# EAGLE board temaTSCpcb (EAGLE 9.7.0)
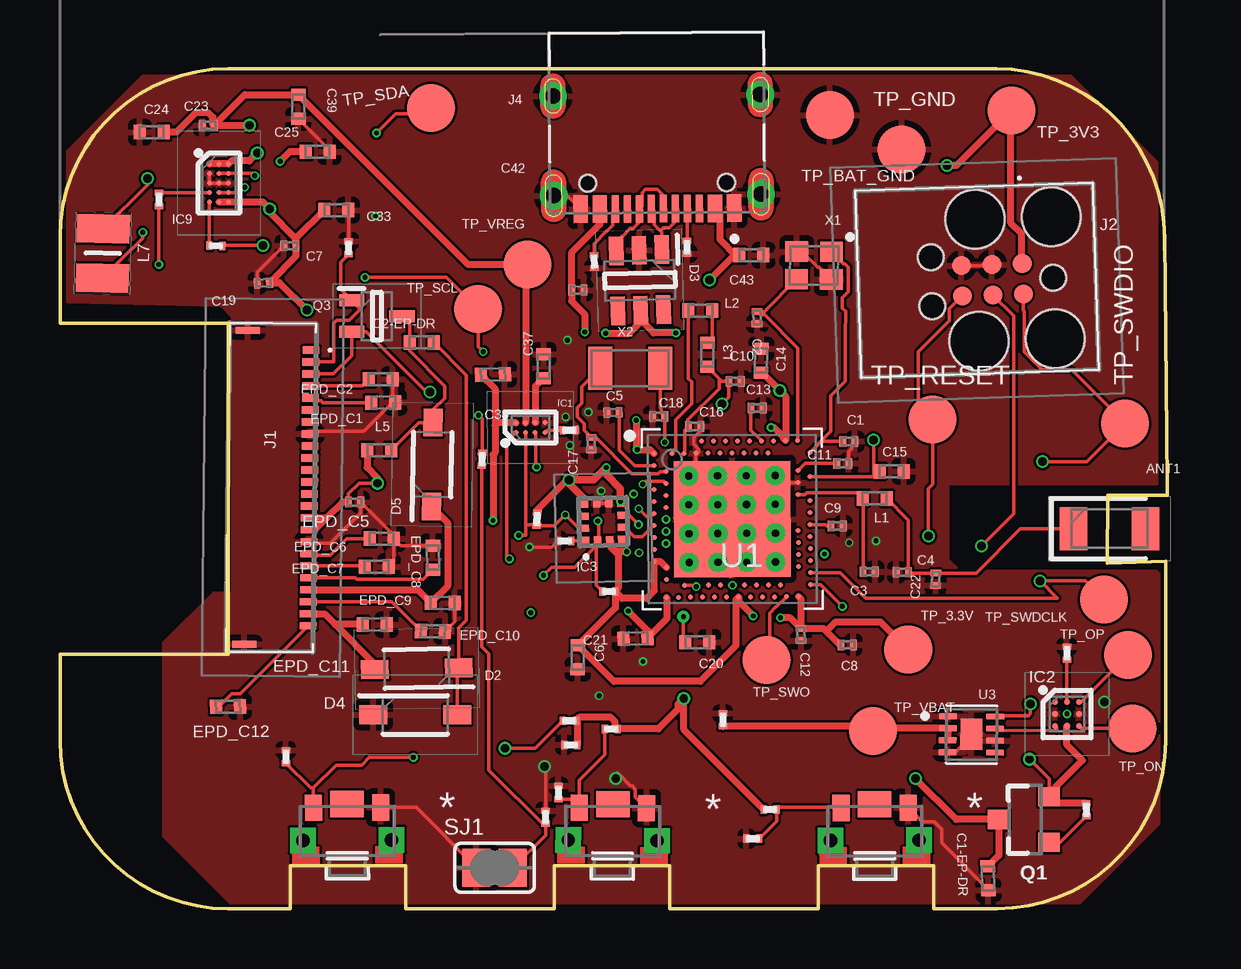
[diagram p0: board, top side]
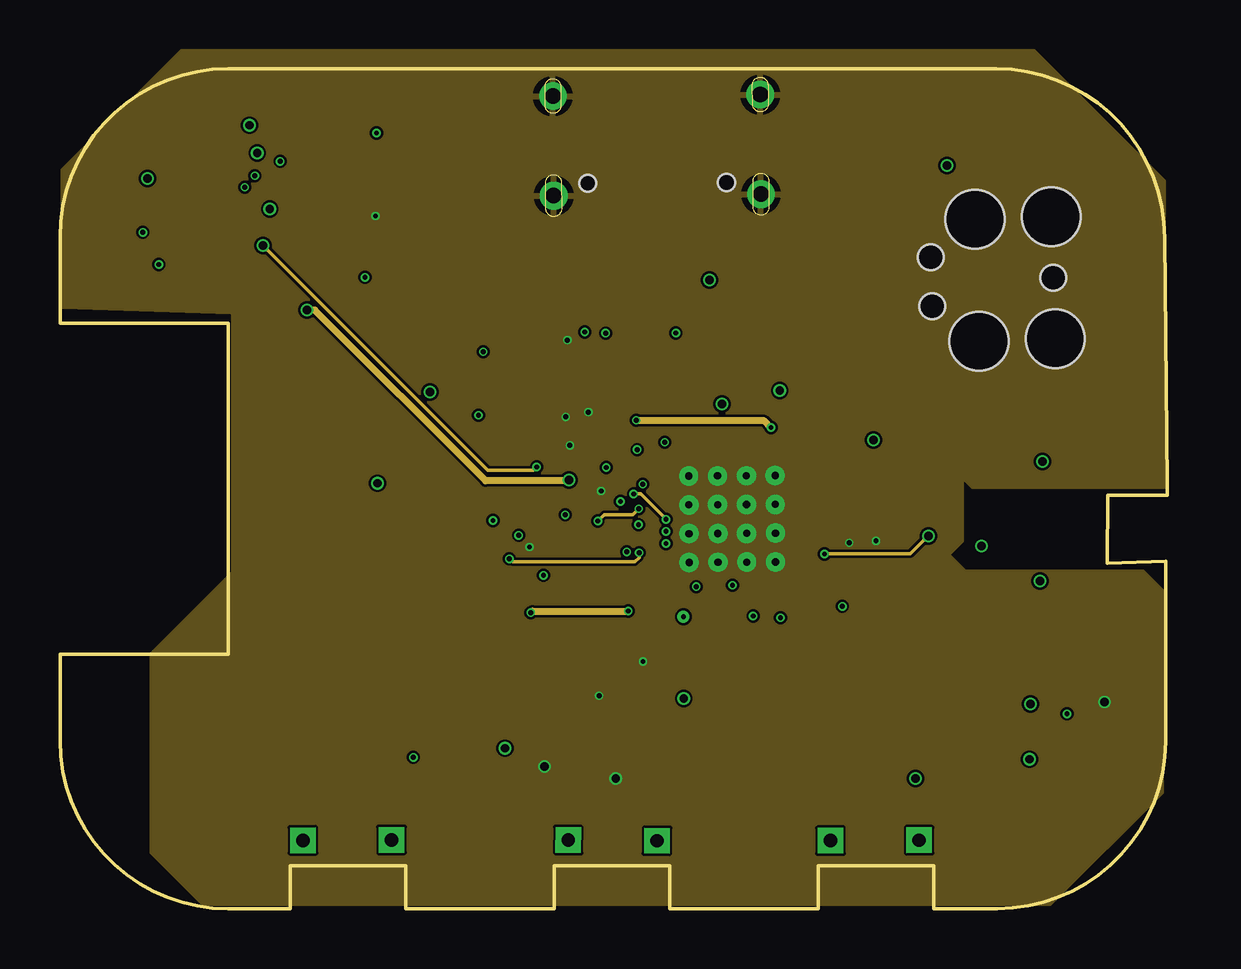
[diagram p1: board, inner layer Route2]
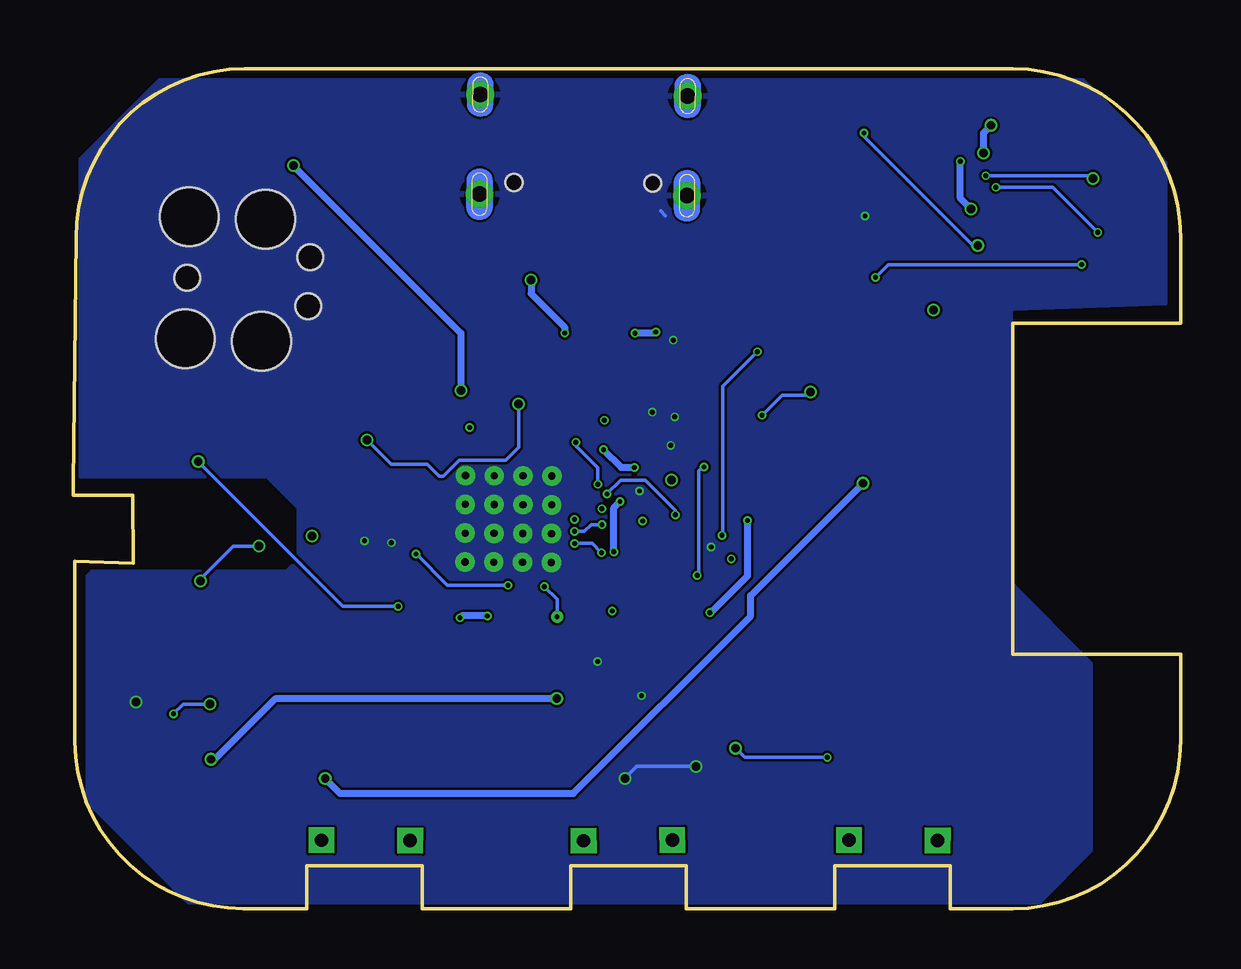
[diagram p2: board, bottom side, seen from below]

Size 46.14 x 35 mm. Coordinates in mm from the lower left corner, seen from the top.
Outline: 39.05,0.01 36.4,0 36.4,1.8 31.6,1.8 31.6,0 25.4,0 25.4,1.8 20.6,1.8 20.6,0 14.4,0 14.4,1.8 9.6,1.8 9.6,0 7,0 arc-90 0,7 0,10.6 7,10.6 7,24.4 0,24.4 0,28 arc-90 7,35 39,35 arc-90 46.02,27.96 46.14,17.68 46.14,17.23 43.66,17.23 43.64,14.39 46.07,14.47 46.07,7.04 46.07,6.97 arc-90 39.05,0.01
Copper layers (1+2*15+16): Top 0.035mm / dielectric 1.5mm / Route2 0.035mm / dielectric 0.15mm / Route15 0.035mm / dielectric 0.2mm / Bottom 0.035mm
Design rules "default.edru *": minimum track width 6mil, minimum drill 0.2mm, track to track 0.1mm, track to pad 0.1mm, pad to pad 6mil, via to via 0.1mm, smd to smd 6mil, copper to edge 0mil, drill to drill 0.1mm, minimum pad ring 10mil, minimum via ring 0.075mm, stop-mask expansion 4mil, vias tented up to drill 9999mil, thermal gap 10mil

## Footprints (pad centres in the part's own frame; a part is rotated, then mirrored left to right if it is on the bottom)
2450AT18B100E_ANTC3216X140N = smd 1.15 x 1.8: 1 -1.5,0; 2 1.5,0
NORDIC_NRF_3_RESC0201_L = smd 0.28 x 0.43: 1 -0.255,0; 2 0.255,0
NORDIC_NRF_3_RESC0402_L = smd 0.5 x 0.6: 1 -0.5,0; 2 0.5,0
GRM011R60J152KE01L_1_0201 = smd 0.35 x 0.25: 1 0,0.275; 2 0,-0.275
ESP32_C6_LIBRARY_5_SOD3716X135N = smd 1.15 x 0.8: 1 -1.75,0; 2 1.75,0
ESP32_C6_LIBRARY_3_SOT95P280X145-6N = smd 1.2 x 0.6: 1 -1.25,0.95; 2 -1.25,0; 3 -1.25,-0.95; 4 1.25,-0.95; 5 1.25,0; 6 1.25,0.95
BQ25180YBGR_BGA8C40P2X4_100X155X50 = smd 0.2 x 0.2: A1 -0.2,0.6; A2 0.2,0.6; B1 -0.2,0.2; B2 0.2,0.2; C1 -0.2,-0.2; C2 0.2,-0.2; D1 -0.2,-0.6; D2 0.2,-0.6
DRV2605YZFR_BGA9C50P3X3_144X144X62 = smd 0.25 x 0.25: A1 -0.5,0.5; A2 0,0.5; A3 0.5,0.5; B1 -0.5,0; B2 0,0; B3 0.5,0; C1 -0.5,-0.5; C2 0,-0.5; C3 0.5,-0.5
BMA423_BMA423 = smd 0.3 x 0.35: 1 -0.75,-0.775; 2 -0.25,-0.775; 3 0.25,-0.775; 4 0.75,-0.775; 7 0.75,0.775; 8 0.25,0.775; 9 -0.25,0.775; 10 -0.75,0.775 | smd 0.35 x 0.3: 5 0.775,-0.25; 6 0.775,0.25; 11 -0.775,0.25; 12 -0.775,-0.25
RT6160AWSC_BGA15C40P3X5_140X230X60 = smd 0.216 x 0.216: A1 -0.4,0.8; A2 0,0.8; A3 0.4,0.8; B1 -0.4,0.4; B2 0,0.4; B3 0.4,0.4; C1 -0.4,0; C2 0,0; C3 0.4,0; D1 -0.4,-0.4; D2 0,-0.4; D3 0.4,-0.4; E1 -0.4,-0.8; E2 0,-0.8; E3 0.4,-0.8
503480-2400_5034802400 = smd 0.3 x 0.7: 1 -5.75,1.525; 2 -5.25,1.525; 3 -4.75,1.525; 4 -4.25,1.525; 5 -3.75,1.525; 6 -3.25,1.525; 7 -2.75,1.525; 8 -2.25,1.525; 9 -1.75,1.525; 10 -1.25,1.525; 11 -0.75,1.525; 12 -0.25,1.525; 13 0.25,1.525; 14 0.75,1.525; 15 1.25,1.525; 16 1.75,1.525; 17 2.25,1.525; 18 2.75,1.525; 19 3.25,1.525; 20 3.75,1.525; 21 4.25,1.525; 22 4.75,1.525; 23 5.25,1.525; 24 5.75,1.525 | smd 0.3 x 1: MP1 -6.54,-1.125; MP2 6.54,-1.125
TC2030-IDC_TC2030IDC = smd 0.783 x 0.783: 1 -0.953,-0.635; 2 -0.953,0.635; 3 0.317,-0.635; 4 0.317,0.635; 5 1.588,-0.635; 6 1.588,0.635 | hole 2.451: -2.223,-2.54; -2.223,2.54; 0.952,-2.54; 0.952,2.54 | hole 1.067: -2.223,0; 2.857,-1.016; 2.857,1.016
KH-TYPE-C-16P_KINGHELM_KH-TYPE-C-16P = smd 0.6 x 1.15: A1_B12 -3.2,4.725; A4_B9 -2.4,4.725; A9_B4 2.4,4.725; A12_B1 3.2,4.725 | smd 0.3 x 1.15: A5 -1.25,4.725; A6 -0.25,4.725; A7 0.25,4.725; A8 1.25,4.725; B5 1.75,4.725; B6 0.75,4.725; B7 -0.75,4.725; B8 -1.75,4.725 | drill 0.65 pad 1.05: SH1 -4.32,0; SH2 4.32,0; SH3 -4.32,4.15; SH4 4.32,4.15 | hole 0.7: -2.89,3.65; 2.89,3.65
NORDIC_NRF_2_RESC0402_L = smd 0.5 x 0.6: 1 -0.5,0; 2 0.5,0
MLP2016SR47MT0S1_INDC2016X100N = smd 1.2 x 2.2: 1 -1.028,0; 2 1.028,0
ESP32_C6_LIBRARY_4_ESP32_C6_LIBRARY_4_ESP32_C6_LIBRARY_4_ESP32_C6_LIBRARY_4_ESP32_WROVER_SPARKFUN-DISCRETESEMI_SOT23-3 = smd 0.8 x 0.9: 1 -0.95,-1; 2 0.95,-1; 3 0,1.1
ESP32_C6_LIBRARY_6_SOT65P210X110-3N = smd 1.05 x 0.5: 1 -1.05,0.65; 2 -1.05,-0.65; 3 1.05,0
ERA-1AEB3401C_0201 = smd 0.35 x 0.25: 1 0,0.275; 2 0,-0.275
ESP32_C6_LIBRARY_7_JUMPER_SJ = smd 1.168 x 1.6: 1 -0.762,0; 2 0.762,0
2025-10-22_07-23-44_LIBRARY_SW_EVP-AKE31A_PAN = smd 0.711 x 1.092: 1 -1.4,-0.972; 2 1.4,-0.972 | drill 0.559 pad 0.914 square: 3 -1.848,0.381; 4 1.848,0.381 | smd 1.397 x 1.092: 5 0,-1.124
HECTOR_WATCH_1_TP20R = smd 2 x 2: TP 0,0
NORDIC_NRF_4_AQFN50P700X700X85_HS-74N = smd 4.85 x 4.85: P$74 0,0 | drill 0.3 pad 0.6: P$75 -1.8,1.8; P$76 -0.6,1.8; P$77 0.6,1.8; P$78 1.8,1.8; P$79 -1.8,0.6; P$80 -0.6,0.6; P$81 0.6,0.6; P$82 1.8,0.6; P$83 -1.8,-0.6; P$84 -0.6,-0.6; P$85 0.6,-0.6; P$86 1.8,-0.6; P$87 -1.8,-1.8; P$88 -0.6,-1.8; P$89 0.6,-1.8; P$90 1.8,-1.8 | smd 0.2 x 0.2: P$A8 -1.25,3.25; P$A10 -0.75,3.25; P$A12 -0.25,3.25; P$A14 0.25,3.25; P$A16 0.75,3.25; P$A18 1.25,3.25; P$A20 1.75,3.25; P$A22 2.25,3.25; P$A23 2.75,3.25; P$AA24 3.25,-2.25; P$AB2 -2.75,-2.5; P$AC5 -2,-2.75; P$AC9 -1,-2.75; P$AC11 -0.5,-2.75; P$AC13 0,-2.75; P$AC15 0.5,-2.75; P$AC17 1,-2.75; P$AC19 1.5,-2.75; P$AC21 2,-2.75; P$AC24 3.25,-2.75; P$AD2 -2.75,-3.25; P$AD4 -2.25,-3.25; P$AD6 -1.75,-3.25; P$AD8 -1.25,-3.25; P$AD10 -0.75,-3.25; P$AD12 -0.25,-3.25; P$AD14 0.25,-3.25; P$AD16 0.75,-3.25; P$AD18 1.25,-3.25; P$AD20 1.75,-3.25; P$AD22 2.25,-3.25; P$AD23 2.75,-3.25; P$B1 -3.25,2.75; P$B3 -2.5,2.75; P$B5 -2,2.75; P$B7 -1.5,2.75; P$B9 -1,2.75; P$B11 -0.5,2.75; P$B13 0,2.75; P$B15 0.5,2.75; P$B17 1,2.75; P$B19 1.5,2.75; P$B24 3.25,2.75; P$C1 -3.25,2.25; P$D2 -2.75,2; P$D23 2.75,2; P$E24 3.25,1.75; P$F2 -2.75,1.5; P$F23 2.75,1.5; P$G1 -3.25,1.25; P$H2 -2.75,1; P$H23 2.75,1; P$J1 -3.25,0.75; P$J24 3.25,0.75; P$K2 -2.75,0.5; P$L1 -3.25,0.25; P$L24 3.25,0.25; P$M2 -2.75,0; P$N1 -3.25,-0.25; P$N24 3.25,-0.25; P$P2 -2.75,-0.5; P$P23 2.75,-0.5; P$R1 -3.25,-0.75; P$R24 3.25,-0.75; P$T2 -2.75,-1; P$T23 2.75,-1; P$U1 -3.25,-1.25; P$U24 3.25,-1.25; P$V23 2.75,-1.5; P$W1 -3.25,-1.75; P$W24 3.25,-1.75; P$Y2 -2.75,-2; P$Y23 2.75,-2
ESP32_C6_LIBRARY_SON50P200X200X80-9N = smd 0.76 x 0.27: 1 -0.985,0.75; 2 -0.985,0.25; 3 -0.985,-0.25; 4 -0.985,-0.75; 5 0.985,-0.75; 6 0.985,-0.25; 7 0.985,0.25; 8 0.985,0.75 | smd 0.9 x 1.3: 9 0,0
NORDIC_NRF_BT-XTAL_2016_N = smd 0.95 x 0.85: 1 -0.725,-0.575; 2 0.725,-0.575; 3 0.725,0.575; 4 -0.725,0.575
NORDIC_NRF_1_XTAL_3215_N = smd 1 x 1.8: 1 -1.25,0; 2 1.25,0

## Placement (x,y rotation side)
ANT1  2450AT18B100E_2450AT18B100E  [2450AT18B100E_ANTC3216X140N]  43.73,15.84 0 top
C1  12pF  [NORDIC_NRF_3_RESC0201_L]  32.87,19.47 0 top
C1-EP-DR  10uF  [NORDIC_NRF_3_RESC0402_L]  38.67,1.27 271.4 top
C2  12pF  [NORDIC_NRF_3_RESC0201_L]  29.05,24.63 270.1 top
C2-EP-DR  4.7uF/25V  [NORDIC_NRF_3_RESC0402_L]  15.06,23.6 179.9 top
C3  1pF  [NORDIC_NRF_3_RESC0201_L]  33.72,14.04 0 top
C4  1pF  [NORDIC_NRF_3_RESC0201_L]  35.1,14.02 179.3 top
C5  100nF  [NORDIC_NRF_3_RESC0201_L]  23.04,20.68 181.2 top
C6  4.7uF  [NORDIC_NRF_3_RESC0402_L]  21.58,10.48 269.5 top
C7  100nF  [NORDIC_NRF_3_RESC0201_L]  9.57,27.62 179.8 top
C8  100nF  [NORDIC_NRF_3_RESC0201_L]  32.8,11 0 top
C9  820pF  [NORDIC_NRF_3_RESC0201_L]  32.38,15.95 0 top
C10  N.C.  [NORDIC_NRF_3_RESC0201_L]  28.13,21.97 0 top
C11  100pF  [NORDIC_NRF_3_RESC0201_L]  32.62,18.55 0 top
C12  100nF  [NORDIC_NRF_3_RESC0201_L]  30.87,11.43 270.9 top
C13  N.C.  [NORDIC_NRF_3_RESC0201_L]  29.05,20.86 0 top
C14  4.7uF  [NORDIC_NRF_3_RESC0402_L]  29.21,22.83 88.9 top
C15  1.0uF  [NORDIC_NRF_3_RESC0402_L]  34.65,18.22 0 top
C16  47nF  [NORDIC_NRF_3_RESC0201_L]  26.45,20.1 0 top
C17  12pF  [NORDIC_NRF_3_RESC0201_L]  22.13,19.38 90 top
C18  12pF  [NORDIC_NRF_3_RESC0201_L]  24.94,20.51 0 top
C19  100nF  [NORDIC_NRF_3_RESC0201_L]  8.48,26.08 183 top
C20  4.7uF  [NORDIC_NRF_3_RESC0402_L]  26.56,11.1 0 top
C21  4.7uF  [NORDIC_NRF_3_RESC0402_L]  23.97,11.27 181.4 top
C22  N.C.  [NORDIC_NRF_3_RESC0201_L]  36.49,13.73 268.8 top
C23  0.1uF  [NORDIC_NRF_3_RESC0201_L]  6.18,32.65 0.3 top
C24  10uF  [NORDIC_NRF_3_RESC0402_L]  3.83,32.36 0 top
C25  22uF  [NORDIC_NRF_3_RESC0402_L]  10.74,31.54 0 top
C26  0.1uF  [GRM011R60J152KE01L_1_0201]  27.62,7.87 0 top
C29  1uF  [GRM011R60J152KE01L_1_0201]  28.87,2.92 90 top
C30  1uF  [GRM011R60J152KE01L_1_0201]  9.41,6.34 0 top
C31  1uF  [GRM011R60J152KE01L_1_0201]  20.77,4.84 0 top
C32  1uF  [GRM011R60J152KE01L_1_0201]  41.96,10.65 0 top
C33  22uF  [NORDIC_NRF_3_RESC0402_L]  11.5,29.11 0 top
C34  0.1uF  [GRM011R60J152KE01L_1_0201]  21.28,6.83 90 top
C37  1uF  [NORDIC_NRF_3_RESC0402_L]  20.15,22.61 90 top
C38  1uF  [NORDIC_NRF_3_RESC0402_L]  18.04,22.26 1.1 top
C39  10uF  [NORDIC_NRF_3_RESC0402_L]  9.93,33.42 270.1 top
C42  0.1uF  [NORDIC_NRF_3_RESC0201_L]  21.58,25.78 359.3 top
C43  4.7uF  [NORDIC_NRF_3_RESC0402_L]  28.81,27.24 0 top
D2  ESP32_C6_LIBRARY_5_MBR0530  [ESP32_C6_LIBRARY_5_SOD3716X135N]  14.87,10 181.1 top
D3  ESP32_C6_LIBRARY_3_USBLC6-2SC6Y  [ESP32_C6_LIBRARY_3_SOT95P280X145-6N]  24.16,26.19 271.5 top
D4  ESP32_C6_LIBRARY_5_MBR0530  [ESP32_C6_LIBRARY_5_SOD3716X135N]  14.8,8.08 0 top
D5  ESP32_C6_LIBRARY_5_MBR0530  [ESP32_C6_LIBRARY_5_SOD3716X135N]  15.51,18.51 89 top
EPD_C1  1uF/50V  [NORDIC_NRF_3_RESC0402_L]  13.47,21.09 180.7 top
EPD_C2  1uF/50V  [NORDIC_NRF_3_RESC0402_L]  13.37,22.06 180 top
EPD_C5  0.1uF/50V  [NORDIC_NRF_3_RESC0201_L]  12.28,16.94 180.1 top
EPD_C6  1uF/50V  [NORDIC_NRF_3_RESC0402_L]  13.41,15.42 179.6 top
EPD_C7  1uF/50V  [NORDIC_NRF_3_RESC0402_L]  13.2,14.25 180.1 top
EPD_C8  1uF/50V  [NORDIC_NRF_3_RESC0402_L]  15.54,14.63 270.3 top
EPD_C9  1uF/50V  [NORDIC_NRF_3_RESC0402_L]  15.95,12.74 179.5 top
EPD_C10  1uF/50V  [NORDIC_NRF_3_RESC0402_L]  15.54,11.56 179.4 top
EPD_C11  1uF/50V  [NORDIC_NRF_3_RESC0402_L]  13.11,11.84 179.7 top
EPD_C12  1uF/50V  [NORDIC_NRF_3_RESC0402_L]  7,8.42 180.4 top
IC1  BQ25180YBGR_BQ25180YBGR  [BQ25180YBGR_BGA8C40P2X4_100X155X50]  19.6,20.05 90.1 top
IC2  DRV2605YZFR_DRV2605YZFR  [DRV2605YZFR_BGA9C50P3X3_144X144X62]  41.95,8.12 0 top
IC3  BMA423_BMA423  [BMA423_BMA423]  22.63,16.12 1.4 top
IC9  RT6160AWSC_RT6160AWSC  [RT6160AWSC_BGA15C40P3X5_140X230X60]  6.62,30.24 0 top
J1  503480-2400_503480-2400  [503480-2400_5034802400]  8.87,17.55 269.4 top
J2  TC2030-IDC_TC2030-IDC  [TC2030-IDC_TC2030IDC]  39.16,26.22 181.9 top
J4  KH-TYPE-C-16P_KH-TYPE-C-16P  [KH-TYPE-C-16P_KINGHELM_KH-TYPE-C-16P]  24.86,33.89 180.4 top
L1  3.9nH  [NORDIC_NRF_2_RESC0402_L]  33.95,17.1 0 top
L2  10uH  [NORDIC_NRF_2_RESC0402_L]  26.69,24.93 0 top
L3  15uH  [NORDIC_NRF_2_RESC0402_L]  26.97,23.08 269.7 top
L5  68uH  [NORDIC_NRF_2_RESC0402_L]  13.29,19.1 0 top
L7  MLP2016SR47MT0S1_FTC252012SR47MBCA  [MLP2016SR47MT0S1_INDC2016X100N]  1.79,27.31 268.7 top
Q1  20V/4.2A/52mΩ/1.4W  [ESP32_C6_LIBRARY_4_ESP32_C6_LIBRARY_4_ESP32_C6_LIBRARY_4_ESP32_C6_LIBRARY_4_ESP32_WROVER_SPARKFUN-DISCRETESEMI_SOT23-3]  40.22,3.72 90 top
Q3  ESP32_C6_LIBRARY_6_SI1308EDL-T1-GE3  [ESP32_C6_LIBRARY_6_SOT65P210X110-3N]  13.2,24.7 0 top
R1_EP_DR  0.47  [ERA-1AEB3401C_0201]  17.58,18.73 178.1 top
R1_USB  5K1  [ERA-1AEB3401C_0201]  26.13,27.56 180.5 top
R2  0  [ERA-1AEB3401C_0201]  6.49,27.62 268.1 top
R2_EP_DR  10K  [ERA-1AEB3401C_0201]  12.03,27.54 0 top
R2_USB  5K1  [ERA-1AEB3401C_0201]  22.26,26.97 2 top
R3  0  [ERA-1AEB3401C_0201]  21.03,15.33 90 top
R4  0  [ERA-1AEB3401C_0201]  4.13,29.55 180 top
R5  10K  [ERA-1AEB3401C_0201]  21.23,7.83 90 top
R7  10K  [ERA-1AEB3401C_0201]  29.6,4.14 270.9 top
R8  10K  [ERA-1AEB3401C_0201]  22.97,7.49 90 top
R9  10K  [ERA-1AEB3401C_0201]  21.21,19.94 270.3 top
R17  3K3  [ERA-1AEB3401C_0201]  19.87,16.23 357.7 top
R18  3k3  [ERA-1AEB3401C_0201]  22.86,13.22 270.3 top
R_PWR_EPD  10K  [ERA-1AEB3401C_0201]  42.76,4.13 181.1 top
R_TYPE_SEL  2.2  [ERA-1AEB3401C_0201]  20.23,3.81 0 top
SJ1  [ESP32_C6_LIBRARY_7_JUMPER_SJ]  18.11,1.71 0 top
SW_DN  2025-10-22_07-23-44_LIBRARY_EVP-AKE31ASW_EVP-AKE31A_PAN  [2025-10-22_07-23-44_LIBRARY_SW_EVP-AKE31A_PAN]  33.95,3.23 180.2 top
SW_ENT  2025-10-22_07-23-44_LIBRARY_EVP-AKE31ASW_EVP-AKE31A_PAN  [2025-10-22_07-23-44_LIBRARY_SW_EVP-AKE31A_PAN]  23.03,3.23 179.5 top
SW_UP  2025-10-22_07-23-44_LIBRARY_EVP-AKE31ASW_EVP-AKE31A_PAN  [2025-10-22_07-23-44_LIBRARY_SW_EVP-AKE31A_PAN]  11.97,3.24 180.3 top
TP_3.3V  HECTOR_WATCH_1_TPTP20R  [HECTOR_WATCH_1_TP20R]  35.34,10.8 0 top
TP_3V3  HECTOR_WATCH_1_TPTP20R  [HECTOR_WATCH_1_TP20R]  39.65,33.26 0 top
TP_BAT_GND  HECTOR_WATCH_1_TPTP20R  [HECTOR_WATCH_1_TP20R]  35.07,31.64 0 top
TP_GND  HECTOR_WATCH_1_TPTP20R  [HECTOR_WATCH_1_TP20R]  32.08,33.07 0 top
TP_ON  HECTOR_WATCH_1_TPTP20R  [HECTOR_WATCH_1_TP20R]  44.69,7.51 0 top
TP_OP  HECTOR_WATCH_1_TPTP20R  [HECTOR_WATCH_1_TP20R]  44.5,10.57 0 top
TP_RESET  HECTOR_WATCH_1_TPTP20R  [HECTOR_WATCH_1_TP20R]  36.36,20.39 0 top
TP_SCL  HECTOR_WATCH_1_TPTP20R  [HECTOR_WATCH_1_TP20R]  17.42,24.99 0 top
TP_SDA  HECTOR_WATCH_1_TPTP20R  [HECTOR_WATCH_1_TP20R]  15.47,33.37 188.4 top
TP_SWDCLK  HECTOR_WATCH_1_TPTP20R  [HECTOR_WATCH_1_TP20R]  43.5,12.88 0 top
TP_SWDIO  HECTOR_WATCH_1_TPTP20R  [HECTOR_WATCH_1_TP20R]  44.38,20.23 0 top
TP_SWO  HECTOR_WATCH_1_TPTP20R  [HECTOR_WATCH_1_TP20R]  29.44,10.36 0 top
TP_VBAT  HECTOR_WATCH_1_TPTP20R  [HECTOR_WATCH_1_TP20R]  33.87,7.41 0 top
TP_VREG  HECTOR_WATCH_1_TPTP20R  [HECTOR_WATCH_1_TP20R]  19.47,26.85 0 top
U1  NRF52840_QF  [NORDIC_NRF_4_AQFN50P700X700X85_HS-74N]  28.01,16.24 0.3 top
U3  ESP32_C6_LIBRARY_MAX17048G+T10  [ESP32_C6_LIBRARY_SON50P200X200X80-9N]  37.98,7.26 359.4 top
X1  32MHz  [NORDIC_NRF_BT-XTAL_2016_N]  31.42,26.8 179.6 top
X2  32.768kHz  [NORDIC_NRF_1_XTAL_3215_N]  23.76,22.53 0 top

## Library data of the parts
ANT1 = InkTime_v5; ARROW_PART_NUMBER: 2450AT18B100E; ARROW_PRICE-STOCK: https://www.arrow.com/en/products/2450at18b100e/johanson-dielectrics?utm_currency=USD&region=nac; DESCRIPTION: Antennas 2.45GHz ANTENNA; HEIGHT: 1.4mm; MANUFACTURER_NAME: JOHANSON TECHNOLOGY; MANUFACTURER_PART_NUMBER: 2450AT18B100E; MOUSER_PART_NUMBER: 609-2450AT18B100E; MOUSER_PRICE-STOCK: https://www.mouser.co.uk/ProductDetail/Johanson-Technology/2450AT18B100E?qs=yCnrNFeXz%252Bh5MFsFIXGZGA%3D%3D
C1 C1-EP-DR C2 C2-EP-DR C3-C26 C29-C34 C37-C39 C42 C43 EPD_C1 EPD_C2 EPD_C5-EPD_C12 L1-L3 L5 R1_EP_DR R1_USB R2 R2_EP_DR R2_USB R3-R5 R7-R9 R17 R18 R_PWR_EPD R_TYPE_SEL SJ1 TP_3.3V TP_3V3 TP_BAT_GND TP_GND TP_ON TP_OP TP_RESET TP_SCL TP_SDA TP_SWDCLK TP_SWDIO TP_SWO TP_VBAT TP_VREG U1 X1 X2 = InkTime_v5
D2 D4 D5 = InkTime_v5; AVAILABILITY: In Stock; CHECK_PRICES: https://www.snapeda.com/parts/MBR0530/Onsemi/view-part/?ref=eda; DESCRIPTION: Diode Schottky 30 V 500mA Surface Mount SOD-123; MF: ON Semiconductor; MP: MBR0530; PACKAGE: SOD-123-2 ON Semiconductor; PRICE: None; PURCHASE-URL: https://www.snapeda.com/api/url_track_click_mouser/?unipart_id=179458&manufacturer=ON Semiconductor&part_name=MBR0530&search_term=None; SNAPEDA_LINK: https://www.snapeda.com/parts/MBR0530/Onsemi/view-part/?ref=snap
D3 = InkTime_v5; AVAILABILITY: In Stock; CHECK_PRICES: https://www.snapeda.com/parts/USBLC6-2SC6Y/STMicroelectronics/view-part/?ref=eda; DESCRIPTION: 17V Clamp 5A (8/20µs) Ipp Tvs Diode Surface Mount SOT-23-6; MF: STMicroelectronics; MP: USBLC6-2SC6Y; PACKAGE: SOT-23-6 STMicroelectronics; PRICE: None; SNAPEDA_LINK: https://www.snapeda.com/parts/USBLC6-2SC6Y/STMicroelectronics/view-part/?ref=snap
IC1 = InkTime_v5; ARROW_PART_NUMBER: BQ25180YBGR; ARROW_PRICE-STOCK: https://www.arrow.com/en/products/bq25180ybgr/texas-instruments?utm_currency=USD&region=nac; DESCRIPTION: Charger IC Lithium Ion/Polymer, Lithium Iron Phosphate 8-DSBGA (1.6x1.1); HEIGHT: 0.5mm; MANUFACTURER_NAME: Texas Instruments; MANUFACTURER_PART_NUMBER: BQ25180YBGR; MOUSER_PART_NUMBER: 595-BQ25180YBGR; MOUSER_PRICE-STOCK: https://www.mouser.co.uk/ProductDetail/Texas-Instruments/BQ25180YBGR?qs=doiCPypUmgEWjAK%252BJAX6Tw%3D%3D
IC2 = InkTime_v5; ARROW_PART_NUMBER: DRV2605YZFR; ARROW_PRICE-STOCK: https://www.arrow.com/en/products/drv2605yzfr/texas-instruments?region=nac; DESCRIPTION: Haptic Driver for ERM/LRA with Built-In Library and Smart Loop Architecture; HEIGHT: 0.625mm; MANUFACTURER_NAME: Texas Instruments; MANUFACTURER_PART_NUMBER: DRV2605YZFR
IC3 = InkTime_v5; ARROW_PART_NUMBER: BMA423; ARROW_PRICE-STOCK: https://www.arrow.com/en/products/bma423/bosch; DESCRIPTION: Accelerometers Triaxial low-g 12bit Acceleration Sensor; HEIGHT: 1mm; MANUFACTURER_NAME: BOSCH; MANUFACTURER_PART_NUMBER: BMA423; MOUSER_PART_NUMBER: 262-BMA423; MOUSER_PRICE-STOCK: https://www.mouser.co.uk/ProductDetail/Bosch-Sensortec/BMA423?qs=HXFqYaX1Q2xC%252BSgeGoX3mg%3D%3D
IC9 = InkTime_v5; DESCRIPTION: Buck-Boost Regulator Positive Output Step-Up/Step-Down I2C DC-DC Controller IC 15-WL-CSP (BSC) (1.4x2.3); HEIGHT: 0.6mm; MANUFACTURER_NAME: RICHTEK; MANUFACTURER_PART_NUMBER: RT6160AWSC; MOUSER_PART_NUMBER: 835-RT6160AWSC; MOUSER_PRICE-STOCK: https://www.mouser.co.uk/ProductDetail/Richtek/RT6160AWSC?qs=amGC7iS6iy%2FLd9PSoixZXQ%3D%3D
J1 = InkTime_v5; DESCRIPTION: FFC & FPC Connectors 0.5mm FPC RA SMT Dual Contact 24Ckt; HEIGHT: 1.87mm; MANUFACTURER_NAME: Molex; MANUFACTURER_PART_NUMBER: 503480-2400; MOUSER_PART_NUMBER: 538-503480-2400; MOUSER_PRICE-STOCK: https://www.mouser.co.uk/ProductDetail/Molex/503480-2400?qs=OAhjpuo3Vu7efIoxFh9AOw%3D%3D
J2 = InkTime_v5; DESCRIPTION: CABLE ADAPTER 6 POS; HEIGHT: 19mm; MANUFACTURER_NAME: Tag Connect; MANUFACTURER_PART_NUMBER: TC2030-IDC
J4 = InkTime_v5; AVAILABILITY: Not in stock; CHECK_PRICES: https://www.snapeda.com/parts/KH-TYPE-C-16P/Kinghelm/view-part/?ref=eda; MF: kinghelm; MP: KH-TYPE-C-16P; PACKAGE: None; PRICE: None; SNAPEDA_LINK: https://www.snapeda.com/parts/KH-TYPE-C-16P/Kinghelm/view-part/?ref=snap
L7 = InkTime_v5; DESCRIPTION: SMD / SMT Inductors (Coils), L=0.47?H, L x W x T :; HEIGHT: 1mm; JLCPCB: https://jlcpcb.com/partdetail/6763488-FTC252012SR47MBCA/C5832368; MANUFACTURER_NAME: TDK; MANUFACTURER_PART_NUMBER: FTC252012SR47MBCA
Q1 = InkTime_v5; PROD_ID: TRAN-14388
Q3 = InkTime_v5; AVAILABILITY: In Stock; CHECK_PRICES: https://www.snapeda.com/parts/SI1308EDL-T1-GE3/Vishay+Siliconix/view-part/?ref=eda; DESCRIPTION: Si1308EDL-T1-GE3 N-channel MOSFET Transistor, 1.5 A, 30 V, 3-Pin SC-70 | Siliconix / Vishay SI1308EDL-T1-GE3; MF: Vishay Siliconix; MP: SI1308EDL-T1-GE3; PACKAGE: SOT-323 Vishay Semiconductor; PRICE: None; PURCHASE-URL: https://www.snapeda.com/api/url_track_click_mouser/?unipart_id=274603&manufacturer=Vishay Siliconix&part_name=SI1308EDL-T1-GE3&search_term=None; SNAPEDA_LINK: https://www.snapeda.com/parts/SI1308EDL-T1-GE3/Vishay+Siliconix/view-part/?ref=snap
SW_DN SW_ENT SW_UP = InkTime_v5; COPYRIGHT: Copyright (C) 2025 Ultra Librarian. All rights reserved.; DIGI-KEY_PART_NUMBER_1: P123437TR-ND; DIGI-KEY_PART_NUMBER_2: P123437CT-ND; DIGI-KEY_PART_NUMBER_3: P123437DKR-ND; MANUFACTURER_NAME: Panasonic; MANUFACTURER_PART_NUMBER: EVP-AKE31A
U3 = InkTime_v5; AVAILABILITY: In Stock; CHECK_PRICES: https://www.snapeda.com/parts/MAX17048G+T10/Analog+Devices/view-part/?ref=eda; DESCRIPTION: 3µA 1-Cell/2-Cell Fuel Gauge with ModelGauge; MF: Analog Devices; MP: MAX17048G+T10; PACKAGE: TDFN-8 Maxim; PRICE: None; PURCHASE-URL: https://www.snapeda.com/api/url_track_click_mouser/?unipart_id=329239&manufacturer=Analog Devices&part_name=MAX17048G+T10&search_term=None; SNAPEDA_LINK: https://www.snapeda.com/parts/MAX17048G+T10/Analog+Devices/view-part/?ref=snap

## Nets
3V3/1.7D: C34.2 IC2.C2 Q1.2 R5.2 R7.2 R8.2 R_PWR_EPD.2
3V3/2.4A: C6.1 C7.1 C8.1 C12.1 C14.1 C19.1 C25.1 C33.1 IC3.3 IC3.7 IC3.10 IC9.E2 IC9.E3 J2.1 R17.1 R18.1 TP_3.3V.TP TP_3V3.TP U1.P$A22 U1.P$AD14 U1.P$AD23 U1.P$B1 U1.P$W1 U1.P$Y2
ALERT/1.6C: U3.5
ALERT/2.5C: U1.P$J24
D+/1.5D: D3.4
D+/2.7D: U1.P$AD6
D-/1.5D: D3.6
D-/2.7D: U1.P$AD4
DEC3: C11.1 U1.P$D23
DEC4_6: C10.1 C15.1 C16.1 L3.2 U1.P$B5 U1.P$E24
DN: D3.1 J4.A7 J4.B7
DP: D3.3 J4.A6 J4.B6
EPD_3V3: C1-EP-DR.1 EPD_C5.2 J1.15 J1.16 L5.1 Q1.3
EPD_BUSY/1.5D: J1.9
EPD_BUSY/2.2D: U1.P$AD12
EPD_CS/1.4C: J1.12
EPD_CS/2.2D: U1.P$K2
EPD_DC/1.5D: J1.11
EPD_DC/2.2: U1.P$AD10
EPD_RST/1.5D: J1.10
EPD_RST/2.2D: U1.P$AC11
GDR: J1.2 Q3.1 R2_EP_DR.2
GND: C1-EP-DR.2 C1.2 C2.2 C3.2 C4.2 C5.2 C6.2 C7.2 C8.2 C9.2 C10.2 C11.2 C12.2 C13.2 C14.2 C15.2 C16.2 C17.1 C18.1 C19.2 C20.2 C21.2 C22.2 C23.1 C24.1 C25.2 C26.1 C29.1 C30.1 C31.1 C32.1 C33.2 C34.1 C37.2 C38.2 C39.2 C42.2 C43.2 D3.2 D4.1 EPD_C1.1 EPD_C2.1 EPD_C5.1 EPD_C6.1 EPD_C7.1 EPD_C8.1 EPD_C9.1 EPD_C10.1 EPD_C11.1 EPD_C12.1 IC1.D2 IC2.B1 IC2.B3 IC3.8 IC3.9 IC9.B1 IC9.C1 IC9.C2 IC9.C3 J1.8 J1.17 J1.MP1 J1.MP2 J2.3 J2.5 J4.A1_B12 J4.A12_B1 J4.SH1 J4.SH2 J4.SH3 J4.SH4 R1_USB.1 R2_EP_DR.1 R2_USB.2 R3.1 R9.1 R_TYPE_SEL.1 SJ1.1 SW_DN.1 SW_ENT.1 SW_UP.1 TP_BAT_GND.TP TP_GND.TP U1.P$74 U1.P$75 U1.P$76 U1.P$77 U1.P$78 U1.P$79 U1.P$80 U1.P$81 U1.P$82 U1.P$83 U1.P$84 U1.P$85 U1.P$86 U1.P$87 U1.P$88 U1.P$89 U1.P$90 U1.P$B7 U1.P$F23 U3.1 U3.4 U3.6 U3.9 X1.2 X1.4
HAPTIC_EN/1.4C: IC2.A1
HAPTIC_EN/2.6A: U1.P$U1
IMU_INT1: IC3.5 U1.P$N1
IMU_INT2: IC3.6 U1.P$P2
LX1: IC9.B2 IC9.B3 L7.1
LX2: IC9.D2 IC9.D3 L7.2
MOSI/1.5B: J1.14
MOSI/2.2D: U1.P$B13
N$1: C5.1 U1.P$C1
N$2: C2-EP-DR.2 D5.2 L5.2 Q3.3
N$3: L2.1 U1.P$B3
N$4: IC1.D1 R9.2
N$5: IC9.D1 R4.2
N$6: C3.1 L1.1 U1.P$H23
N$7: IC9.E1 R2.2
N$8: C1.1 U1.P$B24 X1.1
N$9: C2.1 U1.P$A23 X1.3
N$15: EPD_C6.2 J1.18
N$16: C2-EP-DR.1 D2.1 D4.2
N$17: EPD_C7.2 J1.19
N$18: C20.1 U1.P$AC5
N$19: EPD_C2.2 J1.4
N$20: EPD_C1.2 J1.5
N$21: EPD_C8.2 J1.20
N$22: IC3.1 R3.2
N$23: R1_EP_DR.1 R_TYPE_SEL.2 SJ1.2
N$24: EPD_C10.2 J1.22
N$25: EPD_C12.2 J1.24
N$27: J4.B5 R2_USB.1
N$32: C32.2 IC2.A2
N$33: J4.A5 R1_USB.2
N$39: L2.2 L3.1
N$40: C9.1 U1.P$N24
N$42: C13.1 U1.P$A18
OUT+: IC2.A3 TP_OP.TP
OUT-: IC2.C3 TP_ON.TP
P0.00/XL1: C17.2 U1.P$D2 X2.1
P0.01/XL2: C18.2 U1.P$F2 X2.2
P0.04: U1.P$J1
P0.09: U1.P$L24
P0.13/1.5D: C30.2 R5.1 SW_UP.2
P0.13/2.6C: U1.P$AD8
P0.14/1.5D: C31.2 R8.1 SW_ENT.2
P0.14/2,7C: U1.P$AC9
P0.19: U1.P$AC15
P0.20: U1.P$AD16
P0.21: U1.P$AC17
P0.22: U1.P$AD18
P0.23: U1.P$AC19
P0.24: U1.P$AD20
P0.25: U1.P$AC21
P0.26: U1.P$G1
P0.27: U1.P$H2
P0.28: U1.P$B11
P0.29: U1.P$A10
P0.30: U1.P$B9
P0.31: U1.P$A8
P1.01/1.6C: Q1.1 R_PWR_EPD.1
P1.01/2.4B: U1.P$Y23
P1.02/1.6C: C29.2 R7.1 SW_DN.2
P1.02/2.8C: U1.P$W24
P1.03: U1.P$V23
P1.04: U1.P$U24
P1.05: U1.P$T23
P1.06: U1.P$R24
P1.07: U1.P$P23
P1.09: U1.P$R1
P1.10: U1.P$A20
P1.11: U1.P$B19
P1.12: U1.P$B17
P1.13: U1.P$A16
P1.14: U1.P$B15
P1.15: U1.P$A14
PMIC_INT: IC1.A1 U1.P$T2
PREVGH: D5.1 EPD_C9.2 J1.21
PREVGL: D2.2 EPD_C11.2 J1.23
RESE: J1.3 Q3.2 R1_EP_DR.2
RESET: J2.6 TP_RESET.TP U1.P$AC13
RF: ANT1.1 C4.1 C22.1 L1.2
SCK/1.5B: J1.13
SCK/2.2D: U1.P$A12
SCL/1.4C: IC2.C1 U3.7
SCL/2.4C: IC1.B1 IC3.12 R4.1 R17.2 TP_SCL.TP U1.P$M2
SDA/1.4C: IC2.B2 U3.8
SDA/2.4C: IC1.C1 IC3.2 R2.1 R18.2 TP_SDA.TP U1.P$L1
SWDCLK: J2.4 TP_SWDCLK.TP U1.P$AA24
SWDIO: J2.2 TP_SWDIO.TP U1.P$AC24
SWO: TP_SWO.TP U1.P$AD22
VBAT/1.2A: C26.2 TP_VBAT.TP U3.2 U3.3
VBAT/2.5C: C37.1 IC1.C2
VBUS/1.5D: C42.1 C43.1 D3.5 J4.A4_B9 J4.A9_B4
VBUS/2.6D: C21.1 C38.1 IC1.A2 U1.P$AD2
VREG: C23.2 C24.2 C39.1 IC1.B2 IC9.A1 IC9.A2 IC9.A3 TP_VREG.TP

## Tracks (layer width: path | path; a pad name or v marks a point on that pad's centre or on a via)
3V3/1.7D  (via drill 0.35)
  Top 0.152: Q1.2 41.22,5.41 v40.4,6.23
  Top 0.3: R7.2 25.99,7.46 v25.99,8.77 25.75,8.52 25.75,8.31 24.93,7.49 R8.2 23.13,7.61 23.13,7.79 22.95,7.97 21.63,7.97 R5.2 21.55,7.78 C34.2 | IC2.C2 41.95,6.82 42.6,6.18 41.22,4.8 Q1.2 41.48,4.4 R_PWR_EPD.2
  Bottom 0.3: v25.99,8.77 37.69,8.77 40.23,6.23 v40.4,6.23
3V3/2.4A  (via drill 0.2, 0.35)
  Top 0.3: U1.P$AD23 30.87,12.91 C12.1 | C12.1 31.81,11.69 31.91,11.58 | C8.1 32.5,10.99 31.91,11.58 | J2.1 40.07,26.91 40.07,28.12 39.62,28.57 39.62,33.23 TP_3V3.TP 37.35,30.96 v36.96,30.96 | TP_3.3V.TP 34.19,11.94 32.31,11.94 31.95,11.58 31.91,11.58 | C7.1 9.83,27.19 C19.1 9.14,26.09 v10.29,24.94 | C33.1 9.83,27.93 C7.1 | IC9.E2 IC9.E3 8.46,29.44 v8.74,29.16 8.74,29.01 9.83,27.92 C7.1 | U1.P$Y2 25.02,14.47 U1.P$W1 24.77,13.26 24.44,12.93 23.43,12.93 R18.1 | C25.1 9.58,31.54 v9.17,31.14 | C14.1 29.25,22.33 v29.99,21.6 30.24,21.35 U1.P$A22 30.14,19.6 30.14,19.67 29.76,20.05 v29.62,20.05 | v28.88,12.2 28.27,12.81 U1.P$AD14 28.18,12.89 28.18,10.97 26.68,9.48 23.08,9.48 C6.1 23.14,12.53 R18.1 | v30.02,12.12 30.43,12.12 C12.1 | IC3.3 22.95,15.3 22.95,15.06 23.11,14.9 | R18.1 23.26,13.34 23.26,14.75 23.11,14.9 | 21.1,17.83 19.88,16.62 R17.1 | 23.11,14.9 23.58,14.9 v23.61,14.87 | v24.01,20.35 24.01,19.17 v24.05,19.13 24.59,19.13 U1.P$B1
  Top 0.305: IC3.10 21.86,17.07 21.1,17.83 21.14,17.87 v21.22,17.87 22.24,17.87 v22.76,18.39 22.76,18.1 23.35,17.51 v23.35,16.97 23.35,16.92 IC3.7
  Route2 0.152: v21.22,17.87 v21.23,17.86 21.23,17.83
  Route2 0.3: v10.29,24.94 10.62,24.94 17.73,17.83 21.23,17.83 | v24.01,20.35 29.32,20.35 v29.62,20.05
  Bottom 0.3: v8.74,29.16 9.17,29.6 v9.17,31.14 | v36.96,30.96 29.99,23.99 v29.99,21.6 | v23.61,14.87 23.61,16.71 v23.35,16.97 | v28.88,12.2 29.94,12.2 v30.02,12.12 | v24.05,19.13 23.31,18.39 v22.76,18.39
DEC3
  Top 0.152: U1.P$D23 31.05,18.55 C11.1
DEC4_6  (via drill 0.35)
  Top 0.152: U1.P$B5 26.02,19.01 26.02,19.93 C16.1 26.16,20.12 26.16,20.37 27.46,21.67 27.46,22.09 L3.2 27.58,21.97 C10.1 27.87,21.32 v27.59,21.03 | 33.9,18.01 33.93,18.01 C15.1 | 33.9,18.01 U1.P$E24 | v33.9,19.53 33.9,18.01
  Bottom 0.152: v33.9,19.53 32.9,18.53 31.4,18.53 30.9,18.03 30.9,18.01 30.73,18.01 30.06,18.68 28.13,18.68 27.59,19.22 v27.59,21.03
DN
  Top 0.152: J4.A7 24.76,29.04 24.76,28.5 25.02,28.25 | D3.1 25.08,28.19 25.02,28.25 | 25.02,28.25 25.14,28.37 25.39,28.37 25.64,28.62 J4.B7
DP
  Top 0.152: D3.3 23.4,27.53 23.4,28.03 23.42,28.01 23.77,28.36 23.89,28.36 24.14,28.61 J4.B6 24.26,29.28 24.26,29.83 24.39,29.97 24.88,29.97 25.13,29.72 25.13,29.18 J4.A6
EPD_3V3  (via drill 0.35)
  Top 0.152: J1.16 | v13.23,17.73 12.46,17.73 12.02,17.29 EPD_C5.2
  Top 0.3: C1-EP-DR.1 39.12,2.23 Q1.3 37.34,3.72 v35.64,5.42 | EPD_C5.2 11.78,16.94 11.12,16.28 | 11.12,16.28 10.62,15.79 J1.16 | L5.1 12.79,18.38 13.23,17.95 v13.23,17.73 | J1.15 11.12,16.28
  Bottom 0.3: v35.64,5.42 35.03,4.81 25.3,4.81 17.92,12.19 17.92,13.04 v13.23,17.73
GDR
  Top 0.152: J1.2 11.39,22.78 11.4,22.79 11.4,24.39 11.53,24.52 12.05,24.52 12.51,24.99 Q3.1 11.69,25.8 11.69,26.93 R2_EP_DR.2
GND  (via drill 0.2, 0.35)
  Top 0.152: 23.38,5.51 23.22,5.67 | SW_UP.1 14.84,4.22 SJ1.1 | J1.17 10.43,15.22 11.26,15.22 12.53,16.5 EPD_C5.1 13.91,15.56 EPD_C6.1 | C1-EP-DR.2 38.68,0.79 36.73,2.75 36.73,3.31 36.42,3.62 35.93,3.62 SW_DN.1 | v20.2,5.93 20.23,5.9 R_TYPE_SEL.1 | 29.18,29.74 J4.SH3 | 26.49,18.9 U1.P$B7 | 26.49,18.9 26.49,18.32 U1.P$75 | U1.P$F23 30.09,17.75 U1.P$78 | 31.02,11.18 C12.2 | EPD_C6.1 13.91,14.46 EPD_C7.1 | C24.1 3.33,32.65 | 36.97,6.52 U3.4 37.31,6.52 37.59,6.81 37.59,6.88 U3.9 | EPD_C6.1 14.2,15.13 EPD_C8.1 | EPD_C2.1 13.86,21.2 EPD_C1.1 13.86,21.1 12.66,19.9 10.54,19.9 J1.8 | IC9.C3 IC9.C2 IC9.C1 IC9.B1 | U1.P$81 28.4,16.53 U1.P$74 26.79,16.24 U1.P$79 | R2_EP_DR.1 12.03,29.08 C33.2 | C11.2 32.87,19.05 32.98,19.16 32.98,19.33 C1.2 | 32.4,33.03 TP_GND.TP | 23.38,5.51 23.77,5.12 23.84,5.12 23.97,4.99 23.97,4.66 SW_ENT.1 | J4.SH4 21.12,29.71 J4.A12_B1 | X1.4 31.64,26.72 31.57,26.72 30.91,27.38 X1.2 | J2.5 38.78,26.8 J2.3 | 22.23,26.65 R2_USB.2 | C19.2 8.22,26.52 C7.2 | IC3.9 22.37,16.9 IC3.8 | C16.2 26.7,19.91 26.6,19.81 26.41,19.62 26.41,19.34 26.6,19.15 26.6,19.01 26.49,18.9 | EPD_C9.1 16.45,11.97 EPD_C10.1 | R3.1 20.5,15.07 v19.56,15.07 | v23.16,5.43 23.3,5.43 23.38,5.51 | C39.2 11.24,31.61 C25.2
  Bottom 0.152: 21.46,28.87 21.67,29.08 | v20.2,5.93 22.65,5.93 v23.16,5.43
  other vias: 43.53,8.61 13.15,28.87 21.24,19.31 24.29,10.3 22.55,17.4 22.46,8.87 22.01,20.69 21.14,23.69 21.07,20.49 34,15.33 32.88,15.25
  pour Top: 7.2,13.19 7.17,13.16 7.15,13.15 6.41,13.15 4.33,11.07 4.33,3.02 7.09,0.26 42.48,0.26 45.78,3.55 45.78,13.96 45.67,14.06 37.5,14.06 37.47,14.07 37,14.55 36.99,14.58 36.99,17.64 37,17.67 37.02,17.69 37.05,17.7 45.7,17.7 45.7,31.1 42.11,34.69 3.45,34.69 0.31,31.56 0.31,25.29 6.68,25.14 6.69,25.14 6.69,25.14 6.69,25.14 6.71,25.13 6.72,25.13 6.72,25.13 6.72,25.12 6.73,25.11 7.2,24.65 7.21,24.62 7.21,13.21
  pour Bottom: 7.06,13.59 7.04,13.56 3.72,10.24 3.72,2.41 5.88,0.26 41.34,0.26 45.55,4.46 45.55,13.88 45.37,14.06 37.27,14.06 37.25,14.07 36.77,14.55 36.76,14.58 36.76,16.66 36.77,16.68 38.08,18 38.11,18.01 45.85,18.01 45.85,31.25 42.56,34.54 4.06,34.54 0.62,31.1 0.62,25.21 6.98,24.99 7,24.99 7,24.99 7,24.99 7.01,24.98 7.02,24.97 7.02,24.97 7.03,24.97 7.04,24.96 7.04,24.95 7.05,24.95 7.05,24.95 7.05,24.94 7.06,24.92 7.06,24.92 7.06,24.92 7.06,24.91
  pour Route2: 7.21,14.04 7.2,14.02 3.8,10.62 3.8,2.33 5.95,0.18 41.27,0.18 45.93,4.84 45.93,13.27 45.14,14.06 37.73,14.06 37.7,14.07 37.07,14.7 37.06,14.73 37.06,14.76 37.07,14.79 37.59,15.31 37.59,17.79 37.6,17.82 37.62,17.84 37.65,17.86 37.68,17.86 37.71,17.84 38,17.55 46,17.55 46,30.34 40.59,35.76 5.04,35.76 0.09,30.8 0.09,25.06 7.13,24.83 7.15,24.83 7.15,24.83 7.15,24.83 7.16,24.83 7.17,24.82 7.18,24.82 7.18,24.82 7.19,24.81 7.2,24.8 7.2,24.8 7.2,24.8 7.2,24.79 7.21,24.77 7.21,24.77 7.21,24.77 7.21,24.76
IMU_INT1
  Top 0.152: U1.P$N1 24.73,15.97 24.25,15.49 23.94,15.49 23.54,15.89 IC3.5
IMU_INT2  (via drill 0.2)
  Top 0.152: IC3.6 23.72,16.39 v24.1,16.01 | U1.P$P2 | U1.P$P2
  Bottom 0.152: v24.1,16.01 24.56,16.01 24.84,15.72 U1.P$P2
  other vias: 25.25,15.72
LX1  (via drill 0.2, 0.35)
  Top 0.152: L7.1 3.65,30.18 v3.65,30.42 | IC9.B2 IC9.B3 8.02,30.64 v8.12,30.54
  Bottom 0.152: v3.65,30.42 3.77,30.54 v8.12,30.54
LX2  (via drill 0.2)
  Top 0.152: L7.2 2.96,27.48 2.99,27.48 3.45,27.94 v3.45,28.18 | IC9.D2 IC9.D3 7.47,29.84 v7.7,30.06
  Bottom 0.152: v3.45,28.18 5.33,30.06 v7.7,30.06
N$1
  Top 0.152: C5.1 23.3,19.11 23.94,18.46 24.74,18.46 U1.P$C1
N$2
  Top 0.152: Q3.3 14.56,24.38 C2-EP-DR.2 14.56,23.25 16.03,21.78 16.03,21.28 15.54,20.79 D5.2 14.95,20.26 L5.2
N$3
  Top 0.152: U1.P$B3 25.65,19.14 25.65,20.37 26.32,21.04 26.32,21.95 26.19,22.08 L2.1
N$4
  Top 0.152: IC1.D1 20.27,19.92 20.34,19.92 20.35,19.94 R9.2
N$5
  Top 0.152: R4.2 IC9.D1
N$6
  Top 0.152: U1.P$H23 31.03,17.25 31.12,17.34 33.21,17.34 L1.1 33.46,17.08 C3.1
N$7
  Top 0.152: R2.2 IC9.E1
N$8
  Top 0.152: C1.1 31.71,19.47 U1.P$B24 32.12,19.89 32.12,21.37 32.73,21.97 32.73,23.86 32.73,24.89 32.6,25.03 32.6,25.46 32.84,25.7 32.84,26.74 32.71,26.87 32.64,26.87 X1.1
N$9
  Top 0.152: X1.3 29.34,24.88 C2.1 29.19,24.74 29.36,24.74 30.74,23.36 U1.P$A23
N$15
  Top 0.152: J1.18 10.42,14.72 11.25,14.72 11.95,15.42 EPD_C6.2
N$16
  Top 0.152: D4.2 16.55,9.97 D2.1 16.62,11.7 16.93,12.02 16.93,20.35 16.93,22.23 C2-EP-DR.1
N$17
  Top 0.152: EPD_C7.2 12.67,14.28 J1.19
N$18  (via drill 0.2, 0.2 pad 0.5)
  Top 0.152: v26.51,13.42 26.45,13.48 U1.P$AC5 | C20.1 25.98,11.18 v25.98,12.17
  Bottom 0.152: v25.98,12.17 25.98,12.89 v26.51,13.42
N$19
  Top 0.152: EPD_C2.2 12.59,21.78 J1.4
N$20
  Top 0.152: J1.5 10.56,21.16 10.88,21.16 10.95,21.08 EPD_C1.2
N$21
  Top 0.152: J1.20 12.3,13.78 12.36,13.72 15.14,13.72 EPD_C8.2
N$22
  Top 0.152: IC3.1 R3.2
N$23
  Top 0.152: SJ1.2 20.23,3.07 20.23,3.41 | R_TYPE_SEL.2 20.23,3.41 | R1_EP_DR.1 17.57,10.91 17.87,10.62 17.87,5.78 20.23,3.41
N$24
  Top 0.152: J1.22 13.83,12.78 EPD_C10.2
N$25
  Top 0.152: J1.24 7.51,8.95 7.16,8.95 6.62,8.42 EPD_C12.2
N$27
  Top 0.152: J4.B5 23.03,29.04 23.03,28.48 22.77,28.23 22.76,28.23 22.25,27.72 R2_USB.1
N$32
  Top 0.152: C32.2 IC2.A2
N$33
  Top 0.152: J4.A5 26.14,27.86 R1_USB.2
N$39
  Top 0.152: L2.2 27.19,23.8 L3.1
N$40
  Top 0.152: C9.1 31.96,15.94 31.9,16.01 U1.P$N24
N$42
  Top 0.152: C13.1 28.79,19.94 U1.P$A18
OUT+
  Top 0.152: TP_OP.TP 42.54,8.62 IC2.A3
OUT-
  Top 0.152: TP_ON.TP 42.56,7.51 IC2.C3
P0.00/XL1
  Top 0.152: X2.1 21.74,21.76 21.74,21.07 21.56,20.88 21.56,20.5 21.84,20.21 21.84,19.93 C17.2 22.31,19.64 23.82,18.13 24.93,18.13 25,18.2 25.22,18.2 U1.P$D2
P0.01/XL2  (via drill 0.2)
  Top 0.152: X2.2 25.01,20.87 25.06,20.82 25.06,20.65 C18.2 25.2,19.5 v25.2,19.44 | v24.28,17.69 24.4,17.81 25.17,17.81 U1.P$F2
  Bottom 0.152: v25.2,19.44 25.2,19.29 24.28,18.38 v24.28,17.69
P0.13/1.5D  (via drill 0.2, 0.35)
  Top 0.152: SW_UP.2 10.56,5.04 | R5.1 19.8,6.69 v18.54,6.69 | v14.72,6.31 12.89,6.31 12.57,5.98 11.51,5.98 10.56,5.04 | C30.2 10.44,5.04 10.56,5.04
  Bottom 0.152: v18.54,6.69 18.16,6.31 v14.72,6.31
P0.14/1.5D
  Top 0.152: SW_ENT.2 21.64,4.46 | 21.64,4.46 21.64,5.36 22.7,6.42 R8.1 | C31.2 21.53,4.57 21.64,4.46
P1.01/1.6C
  Top 0.152: R_PWR_EPD.1 41.69,2.77 Q1.1
P1.02/1.6C
  Top 0.152: SW_DN.2 32.5,4.23 29.96,4.23 R7.1 29.87,3.65 C29.2
PMIC_INT  (via drill 0.2)
  Top 0.152: IC1.A1 18.61,19.46 18.61,14.69 v18.72,14.58 | U1.P$T2 v25.25,15.22
  Route2 0.152: v18.72,14.58 18.85,14.45 23.96,14.45 24.13,14.62 v24.13,14.83
  Bottom 0.152: v24.13,14.83 24.52,15.22 v25.25,15.22
PREVGH
  Top 0.3: J1.21 14.92,13.28 EPD_C9.2 16.15,13.44 16.15,16.09 D5.1
PREVGL
  Top 0.3: EPD_C11.2 11.46,11.84 | D2.2 13.12,10.19 11.46,11.84 | J1.23 11.02,12.28 11.46,11.84
RESE  (via drill 0.2, 0.35)
  Top 0.152: J1.3 11.39,22.28 12.15,23.04 Q3.2 12.75,24.05 15.27,21.53 v15.42,21.53 | v17.44,20.56 17.59,20.41 R1_EP_DR.2
  Bottom 0.152: v17.44,20.56 16.6,21.39 15.56,21.39 v15.42,21.53
RESET  (via drill 0.2, 0.35)
  Top 0.152: J2.6 37.06,24.99 37.06,24.49 35.77,23.21 35.77,20.98 TP_RESET.TP 36.36,17.69 36.19,17.51 v36.19,15.53 | v28.02,13.48 U1.P$AC13
  Route2 0.152: v36.19,15.53 35.44,14.78 v31.86,14.78
  Bottom 0.152: v31.86,14.78 30.56,13.48 v28.02,13.48
RF
  Top 0.152: L1.2 35.35,16.19 C4.1 35.38,13.99 C22.1 38.17,13.99 40.02,15.83 ANT1.1
SCL/1.4C
  Top 0.152: IC2.C1 41.54,7.53 41.54,7.42 39.02,7.44 U3.7
SCL/2.4C  (via drill 0.2)
  Top 0.152: R4.1 v4.12,26.84 | v12.71,26.31 16.1,26.31 TP_SCL.TP 17.42,23.42 v17.63,23.21 | 19.4,16 19.4,15.56 v19.11,15.56 | 19.4,16 IC1.B1 | 19.4,16 19.82,16 R17.2 20.6,15.96 v21.05,16.41 21.61,15.85 IC3.12 | U1.P$M2
  Route2 0.152: v23.9,17.28 24.19,17.28 U1.P$M2
  Bottom 0.152: v4.12,26.84 12.18,26.84 v12.71,26.31 | v21.05,16.41 21.05,16.61 22.3,17.86 23.33,17.86 v23.9,17.28 | v17.63,23.21 19.08,21.76 19.08,15.59 v19.11,15.56
  other vias: 25.25,16.22
SDA/1.4C  (via drill 0.2, 0.35)
  Top 0.152: U3.8 39.01,8.04 40.36,8.04 40.43,8.12 v40.43,8.52 | IC2.B2
  Bottom 0.152: v40.43,8.52 41.56,8.52 IC2.B2
  other vias: 41.96,8.12
SDA/2.4C  (via drill 0.2, 0.35)
  Top 0.152: R2.1 6.79,27.64 v8.45,27.64 | TP_SDA.TP 15.47,33.13 13.99,33.13 v13.19,32.32 | IC3.2 22.33,15.27 22.33,13.47 R18.2 | 19.83,18.41 19.83,19.82 IC1.C1 | 19.83,18.41 | 19.83,18.41 v19.86,18.41 | IC3.2 22.29,15.23 22.29,15.06 21.45,14.23 20.48,14.23 v20.14,13.89 | IC3.2 22.45,15.39 22.45,16.12 v22.41,16.16 | v24.11,16.67 24.45,16.33 24.61,16.33 U1.P$L1
  Route2 0.152: v8.45,27.64 17.82,18.27 19.72,18.27 v19.86,18.41 | v22.41,16.16 22.67,16.42 23.87,16.42 v24.11,16.67
  Bottom 0.152: v8.45,27.64 8.66,27.64 13.19,32.17 v13.19,32.32 | v20.14,13.89 20.07,13.96 20.07,18.25 19.92,18.41 v19.86,18.41
SWDCLK  (via drill 0.35)
  Top 0.152: U1.P$AA24 32.51,14.01 33.57,12.94 41.55,12.94 v40.83,13.66 42.73,13.66 TP_SWDCLK.TP | J2.4 39.74,24.7 39.74,16.45 v38.4,15.11
  Bottom 0.152: v38.4,15.11 39.47,15.11 40.83,13.75 v40.83,13.66
SWDIO  (via drill 0.2, 0.35)
  Top 0.152: J2.2 40.14,24.93 40.17,24.9 40.17,23.21 40.93,22.45 42.15,22.45 TP_SWDIO.TP 42.78,18.63 v40.93,18.63 | U1.P$AC24 31.69,13.51 v32.6,12.6
  Bottom 0.152: v40.93,18.63 34.9,12.6 v32.6,12.6
SWO
  Top 0.152: U1.P$AD22 29.85,12.58 29.83,12.58 29.56,12.31 29.56,10.49 TP_SWO.TP
VBAT/1.2A
  Top 0.3: U3.3 U3.2 33.98,7.52 TP_VBAT.TP 33.67,7.6 C26.2
VBAT/2.5C
  Top 0.3: C37.1 19.81,21.78 19.81,20.26 19.82,20.26 19.81,20.25 IC1.C2
VBUS/1.5D  (via drill 0.2, 0.35)
  Top 0.152: 28.14,27.24 C43.1
  Top 0.3: J4.A4_B9 27.49,28.99 27.49,27.89 28.14,27.24 28.09,27.24 v27.06,26.21 | v25.66,23.99 24.73,23.99 24.19,24.53 D3.5 24.19,24.46 23.72,23.98 v22.73,23.98 | J4.A9_B4 22.49,28.52 21.3,27.33 21.3,25.8 C42.1 21.32,25.32 21.86,24.78 v21.86,24.03
  Bottom 0.3: v27.06,26.21 27.06,25.63 25.66,24.23 v25.66,23.99 | v21.86,24.03 21.91,23.98 v22.73,23.98
VBUS/2.6D  (via drill 0.2)
  Top 0.3: U1.P$AD2 25.27,12.08 24.53,11.34 | 24.53,11.34 C21.1 | IC1.A2 18.24,20.24 18.13,20.13 | 24.53,11.34 24.53,11.55 v23.68,12.4 | 18.13,20.13 18.13,19.01 18.04,18.92 v18.04,16.18 | C38.1 18.13,21.66 18.13,20.13
  Route2 0.3: v19.61,12.34 19.68,12.4 v23.68,12.4
  Bottom 0.3: v19.61,12.34 19.58,12.34 18.04,13.87 v18.04,16.18
VREG  (via drill 0.35)
  Top 0.3: IC9.A1 IC9.A2 IC9.A3 7.15,31.16 7.89,31.16 v8.22,31.48 | C23.2 7.7,33.92 C39.1 17,26.85 19.4,26.85 | C23.2 6.37,32.65 6.36,32.99 6.19,33.16 5.66,33.16 4.85,32.36 C24.2 | C23.2 v7.89,32.65 v7.89,32.64 | 19.4,26.85 TP_VREG.TP | 19.4,26.85 19.4,20.3 IC1.B2
  Bottom 0.3: v7.89,32.64 8.22,32.32 v8.22,31.48